# Altium PCB Lesson_05_1.PcbDoc
Units mm, origin at the board's own origin, x right, y up, seen from the top; angles counter-clockwise.
Board outline 64.52 x 29.97 mm, 2 copper layers (Top Layer, Bottom Layer); 15 components, 7 nets, 37 pads, 0 vias.
Unrouted connection lines stored in the file: 1.
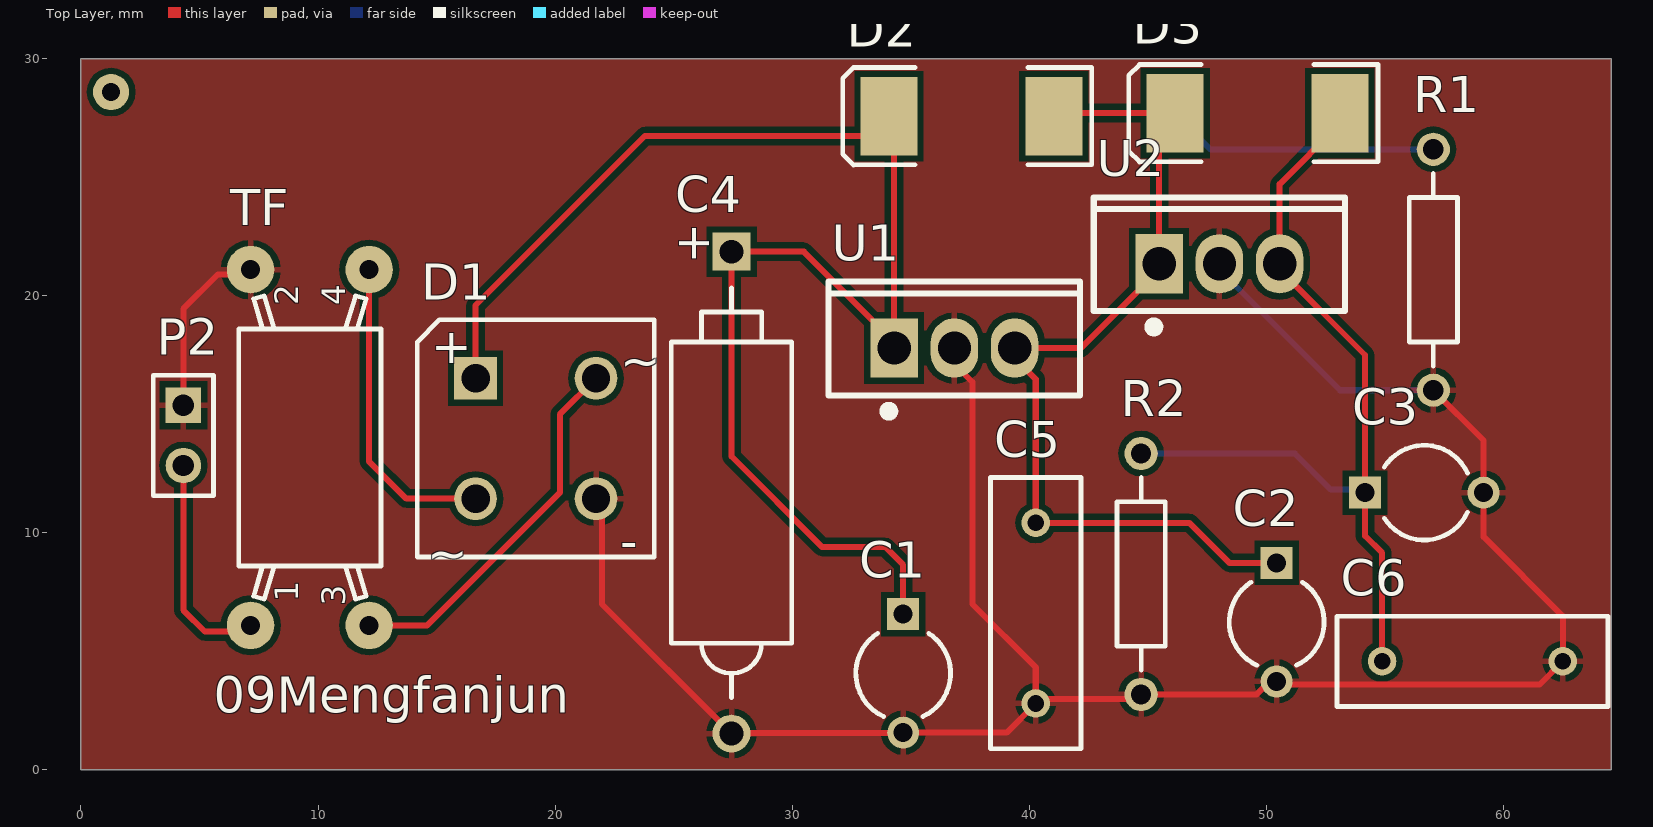
[diagram p0: Top Layer view]
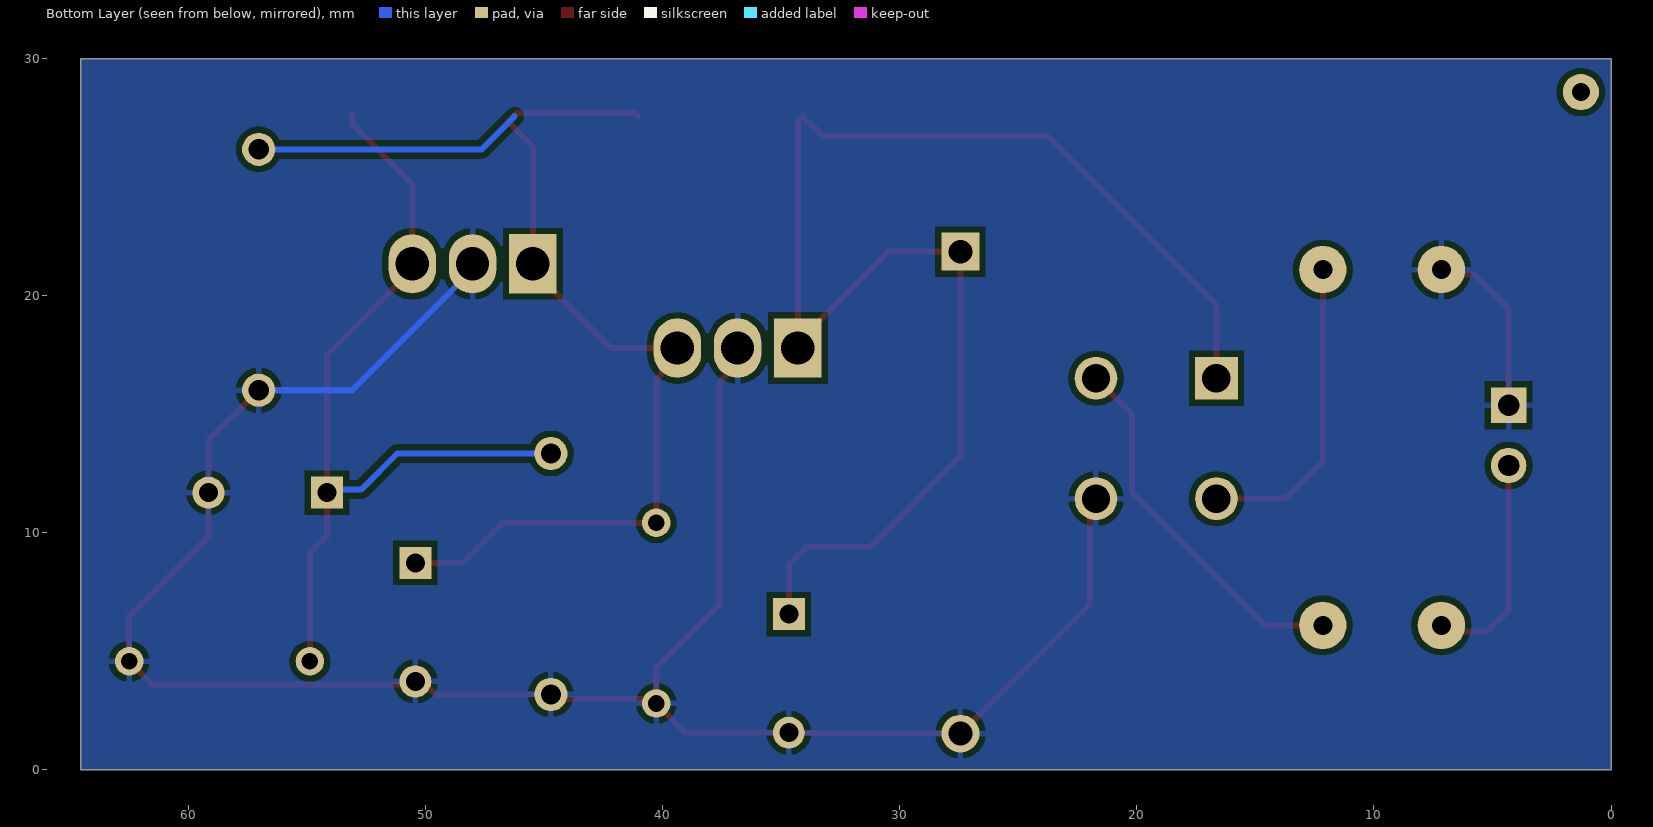
[diagram p1: Bottom Layer view, seen from below]

## Layer stack, top to bottom
Top Solder: solder mask 0.0102, Solder Resist, Dk 3.5
Top Layer: signal copper 0.0356
Dielectric 1: dielectric 0.32, FR-4, Dk 4.8
Bottom Layer: signal copper 0.0356
Bottom Solder: solder mask 0.0102, Solder Resist, Dk 3.5

## Board outline
0,0 0,29.97 64.516,29.97 64.516,0

## Design rules (kind name [scope] priority, off if disabled: settings)
Clearance [All] p1: gap=0.254 ignorepadtopadclearanceinfootprint=FALSE except(0: Arc-Hole Track-Hole SMDPad-Hole THPad-Hole Via-Hole Fill-Hole Poly-Hole Region-Hole Text-Hole)
PolygonConnect [All] p1: connectstyle=Relief reliefconductorwidth=0.254 reliefentries=4 polygonreliefangle="90 Angle" airgapwidth=0.254
RoutingVias [All] p1: holewidth=0.711 width=1.27 viastyle="Through Hole" minholewidth=0.711 minwidth=1.27 maxholewidth=0.711 maxwidth=1.27
SolderMaskExpansion [All] p1: expansion=0.102
Width [All] p1: maxlimit=0.254 minlimit=0.254 preferedwidth=0.254
30 further rules are at their usual default settings.

## Classes and differential pairs
component class Lesson_05: C1 C2 C3 C4 C5 C6 D1 D2 P2 R1 R2 TF U1 U2

## Components (designator, comment, footprint, x,y, rotation, side; value= is the part's Value field where it differs from the comment)
C1 "Cap2" CAPR5-4X5 34.671,4.064 r270 top value=680uF
C2 "Cap2" CAPR5-4X5 50.419,6.223 r270 top value=47uF
C3 "Cap2" CAPR5-4X5 56.642,11.684 r0 top value=47uF
C4 "Cap Pol2" POLAR0.8 27.432,11.684 r90 top value=0.1uF
C5 "Cap" RAD-0.3 40.259,6.604 r90 top value=0.1uF
C6 "Cap" RAD-0.3 58.674,4.572 r180 top value=0.1uF
D1 "Bridge1" D-38 19.177,13.97 r0 top
D2 "Diode" SMC 37.546,27.559 r180 top
D3 "Diode" SMC 49.611,27.686 r180 top
P2 "Header 2" HDR1X2 4.318,15.367 r270 top
R1 "Res2" AXIAL-0.4 57.023,21.082 r90 top value=1K
R2 "Res2" AXIAL-0.4 44.704,8.255 r90 top value=125
TF "Trans" TRANS 9.652,13.589 r90 top
U1 "LM7805" "LM7805-TO220 - duplicate" 36.83,17.811 r0 top
U2 "LM7805" "LM7805-TO220 - duplicate" 48.006,21.367 r0 top

## Footprints (in the part's own frame and the unit in brackets; to place one, negate y for a bottom-side part, rotate by r counter-clockwise, add the part's x,y. Pads: shape width x height; smd on the part's side, far side on the other; paste and mask are expansions set on the pad)
AXIAL-0.4 [mm] "Axial Device, Thru-Hole; 2 Leads; 0.4 in Pin Spacing"
  round 1.4 hole 0.85: 1(-5.08,0) 2(5.08,0)
  silkscreen extent -4.06,-1.02 4.06,1.02
CAPR5-4X5 [mm] "Capacitor; 2 Leads"
  rect 1.35x1.35 hole 0.8: 1(-2.5,0)
  round 1.35 hole 0.8: 2(2.5,0)
  silkscreen extent -1.69,-2 1.82,2
D-38 [mm] "Bridge Rectifier; 4 Terminals; Body 9.4 x 9.4 mm (typ); Pitch 5.08 mm"
  rect 1.8x1.8 hole 1.2: 1(-2.54,2.54)
  round 1.8 hole 1.2: 2(-2.54,-2.54) 3(2.54,-2.54) 4(2.54,2.54)
  silkscreen extent -5,-5 5,5, body extent -5,-5 5,5, height 9.91
HDR1X2 [mm] "Connector; Header; 2 Position"
  rect 1.5x1.5 hole 0.9: 1(0,0)
  round 1.5 hole 0.9: 2(2.54,0)
  silkscreen extent -1.27,-1.27 3.81,1.27
"LM7805-TO220 - duplicate" [mm]
  rect 2x2.5 hole 1.4: 1(-2.54,-0.031)
  oval 2x2.5 hole 1.4: 2(0,-0.031) 3(2.54,-0.031)
  silkscreen extent -5.3,-2.89 5.3,2.77
POLAR0.8 [mm] "Polarized Capacitor; 2 Leads"
  rect 1.6x1.6 hole 1: 1(10.16,0)
  round 1.6 hole 1: 2(-10.16,0)
  silkscreen extent -8.64,-2.54 8.64,2.54
RAD-0.3 [mm] "Radial Cap, Thru-Hole; 2 Leads; 0.3 in Pin Spacing"
  round 1.2 hole 0.7: 1(-3.81,0) 2(3.81,0)
  silkscreen extent -5.71,-1.91 5.71,1.91
SMC [mm] "DO-214-AB/SMC; 2 C-Bend Leads; Body 7.9 x 5.9 mm, inc. leads (LxW)"
  rect 2.4x3.3 smd: 1(-3.475,0) 2(3.475,0)
  silkscreen extent -5.07,-2.05 5.43,2.05
TRANS [mm] "Transformer; 4 Leads"
  round 2 hole 0.8: 1(-7.5,2.5) 2(7.5,2.5) 3(-7.5,-2.5) 4(7.5,-2.5)
  silkscreen extent -6.4,-3 6.4,3

## Part data
C1 C2 C3 C5 C6: "Capacitor", Publisher="Altium Limited"
  C1 C2 C3: PackageDescription="Capacitor; 2 Leads", PackageReference=CAPR5-4X5, Published=23-Sep-2002
  C5 C6: LatestRevisionDate=17-Jul-2002, LatestRevisionNote="Re-released for DXP Platform.", PackageDescription="Radial Cap, Thru-Hole; 2 Leads; 0.3 in Pin Spacing", PackageReference=RAD-0.3, Published=8-Jun-2000
C4: "Polarized Capacitor (Axial)", LatestRevisionDate=17-Jul-2002, LatestRevisionNote="Re-released for DXP Platform.", PackageDescription="Polarized Capacitor; 2 Leads", PackageReference=POLAR0.8, Published=8-Jun-2000, Publisher="Altium Limited"
D1: "Full Wave Diode Bridge", DatasheetVersion=E2732B, LatestRevisionDate=29-May-2009, LatestRevisionNote="Sch pins A & K swapped.", PackageDescription="Bridge Rectifier; 4 Terminals; Body 9.4 x 9.4 mm (typ); Pitch 5.08 mm", PackageReference=D-38, Published=8-Jun-2000, Publisher="Altium Limited"
D2 D3: "Default Diode", Code_JEDEC=DO-214-AB, LatestRevisionDate=17-Jul-2002, LatestRevisionNote="Re-released for DXP Platform.", PackageDescription="DO-214-AB/SMC; 2 C-Bend Leads; Body 7.9 x 5.9 mm, inc. leads (LxW)", PackageReference=SMC, PackageVersion=Sep-1996, Published=8-Jun-2000, Publisher="Altium Limited"
P2: "Header, 2-Pin", LatestRevisionDate=17-Jul-2002, LatestRevisionNote="Re-released for DXP Platform.", Publisher="Altium Limited"
R1 R2: "Resistor", LatestRevisionDate=17-Jul-2002, LatestRevisionNote="Re-released for DXP Platform.", PackageDescription="Axial Device, Thru-Hole; 2 Leads; 0.4 in Pin Spacing", PackageReference=AXIAL-0.4, Published=8-Jun-2000, Publisher="Altium Limited"
TF: "Transformer", LatestRevisionDate=08-Jul-2005, LatestRevisionNote="Mech Layer 1 removed.", PackageDescription="Transformer; 4 Leads", PackageReference=TRANS, Published=24-Mar-1999, Publisher="Altium Limited"

## Free pads (board coordinates)
  round 1.524 hole 0.762 unplated: 1(1.27,28.575)

## Nets (pads, with @x,y where several pads share a name; then routed paths per layer and width w, separated by ;. In a path a pad name is that pad's centre, name@x,y a point inside that pad or via, vN(x,y) a via of type N, cw(c..) or ccw(c..) an arc to the next point about the centre after c; other vN are vias at no path point)
GND: C1.2 C2.2 C3.2 C4.2 C5.1 C6.1 D1.3 P2.1 R1.1 R2.1 TF.2 U1.2 U2.2 | length 97.8
  Top Layer w0.254: P2.1 4.318,19.431 5.771,20.884 6.947,20.884 TF.2 ; D1.3 21.971,11.176 21.971,6.985 C4.2 27.452,1.544 34.651,1.544 C1.2 39.029,1.564 C5.1 ; U1.2 36.83,17.101 37.592,16.339 37.592,6.985 40.259,4.318 C5.1 ; R1.1 59.142,13.883 C3.2 59.142,9.819 62.484,6.477 C6.1 61.503,3.591 50.551,3.591 C2.2 50.122,3.723 49.574,3.175 R2.1 44.504,2.975 40.44,2.975 C5.1
  Bottom Layer w0.254: U2.2 48.006,21.086 53.09,16.002 R1.1
NetC1_1: C1.1 C4.1 D1.1 D2.2 U1.1 | length 62.5
  Top Layer w0.254: D1.1 16.637,19.581 23.784,26.728 33.24,26.728 D2.2 34.29,27.34 U1.1@34.29,18.03 ; U1.1 U1.1@34.29,18.03 ; C1.1@34.671,6.056 C1.1 34.671,8.636 33.909,9.398 31.242,9.398 27.432,13.208 C4.1 30.476,21.844 U1.1@34.29,18.03
NetC2_1: C2.1 C5.2 D2.1 D3.2 R1.2 U1.3 U2.1 | length 49.8
  Top Layer w0.254: D2.1 41.148,27.686 D3.2 46.5,27.323 45.466,26.289 U2.1 45.466,21.086 42.16,17.78 U1.3 39.37,17.355 40.259,16.466 C5.2 46.736,10.414 48.427,8.723 C2.1
  Bottom Layer w0.254: 46.228,27.559 47.625,26.162 R1.2
NetC3_1: C3.1 C6.2 D3.1 R2.2 U2.3 | length 36.1
  Top Layer w0.254: D3.1 53.086,27.236 50.546,24.696 U2.3 50.546,21.086 54.142,17.49 C3.1 54.142,9.866 54.864,9.144 C6.2
  Bottom Layer w0.254: R2.2 51.181,13.335 52.705,11.811 54.015,11.811 C3.1
NetD1_2: D1.2 TF.4 | length 13.2
  Top Layer w0.254: TF.4 12.152,12.994 13.716,11.43 D1.2
NetD1_4: D1.4 TF.3 | length 15.8
  Top Layer w0.254: TF.3 14.598,6.089 20.193,11.684 20.193,14.986 D1.4
NetP2_2: P2.2 TF.1 | length 9.4
  Top Layer w0.254: P2.2 4.318,6.731 5.229,5.82 6.883,5.82 TF.1

## Polygon pours and split planes (outlines as drawn)
GND on Top Layer "Top Layer-No Net" (solid, pour order 4): 0,0 0,29.97 64.516,29.97 64.516,0
GND on Bottom Layer "Top Layer-No Net1" (solid, pour order 5): 0,0 0,29.97 64.516,29.97 64.516,0

## Silkscreen, mask and mechanical layers (free items; w line width, h text height)
Top Overlay:
  text "09Mengfanjun" at 5.588,2.413 h1.52
Mechanical 1:
  the board outline again, w0.254
Mechanical 15:
  lines w0.003: 31.209,21.183 31.209,21.183

## Text inside footprints (layer, text, board x,y; h text height)
C4: Top Overlay "+" at 26.482,21.336 h1.5 r90
D1: Top Overlay "+" at 14.767,17.134 h1.5; Top Overlay "-" at 22.733,8.89 h1.5; Top Overlay "~" at 14.605,8.382 h1.5; Top Overlay "~" at 22.733,16.51 h1.5
TF: Top Overlay "1" at 9.152,7.089 h1 r90; Top Overlay "2" at 9.152,19.589 h1 r90; Top Overlay "3" at 11.152,6.914 h1 r90; Top Overlay "4" at 11.152,19.589 h1 r90